# Altium PCB PandMpcb.PcbDoc
Units mil, origin at the board's own origin, x right, y up, seen from the top; angles counter-clockwise.
Board outline 3937.01 x 3937.01 mil, 2 copper layers (Top Layer, Bottom Layer); 67 components, 44 nets, 220 pads, 423 vias.
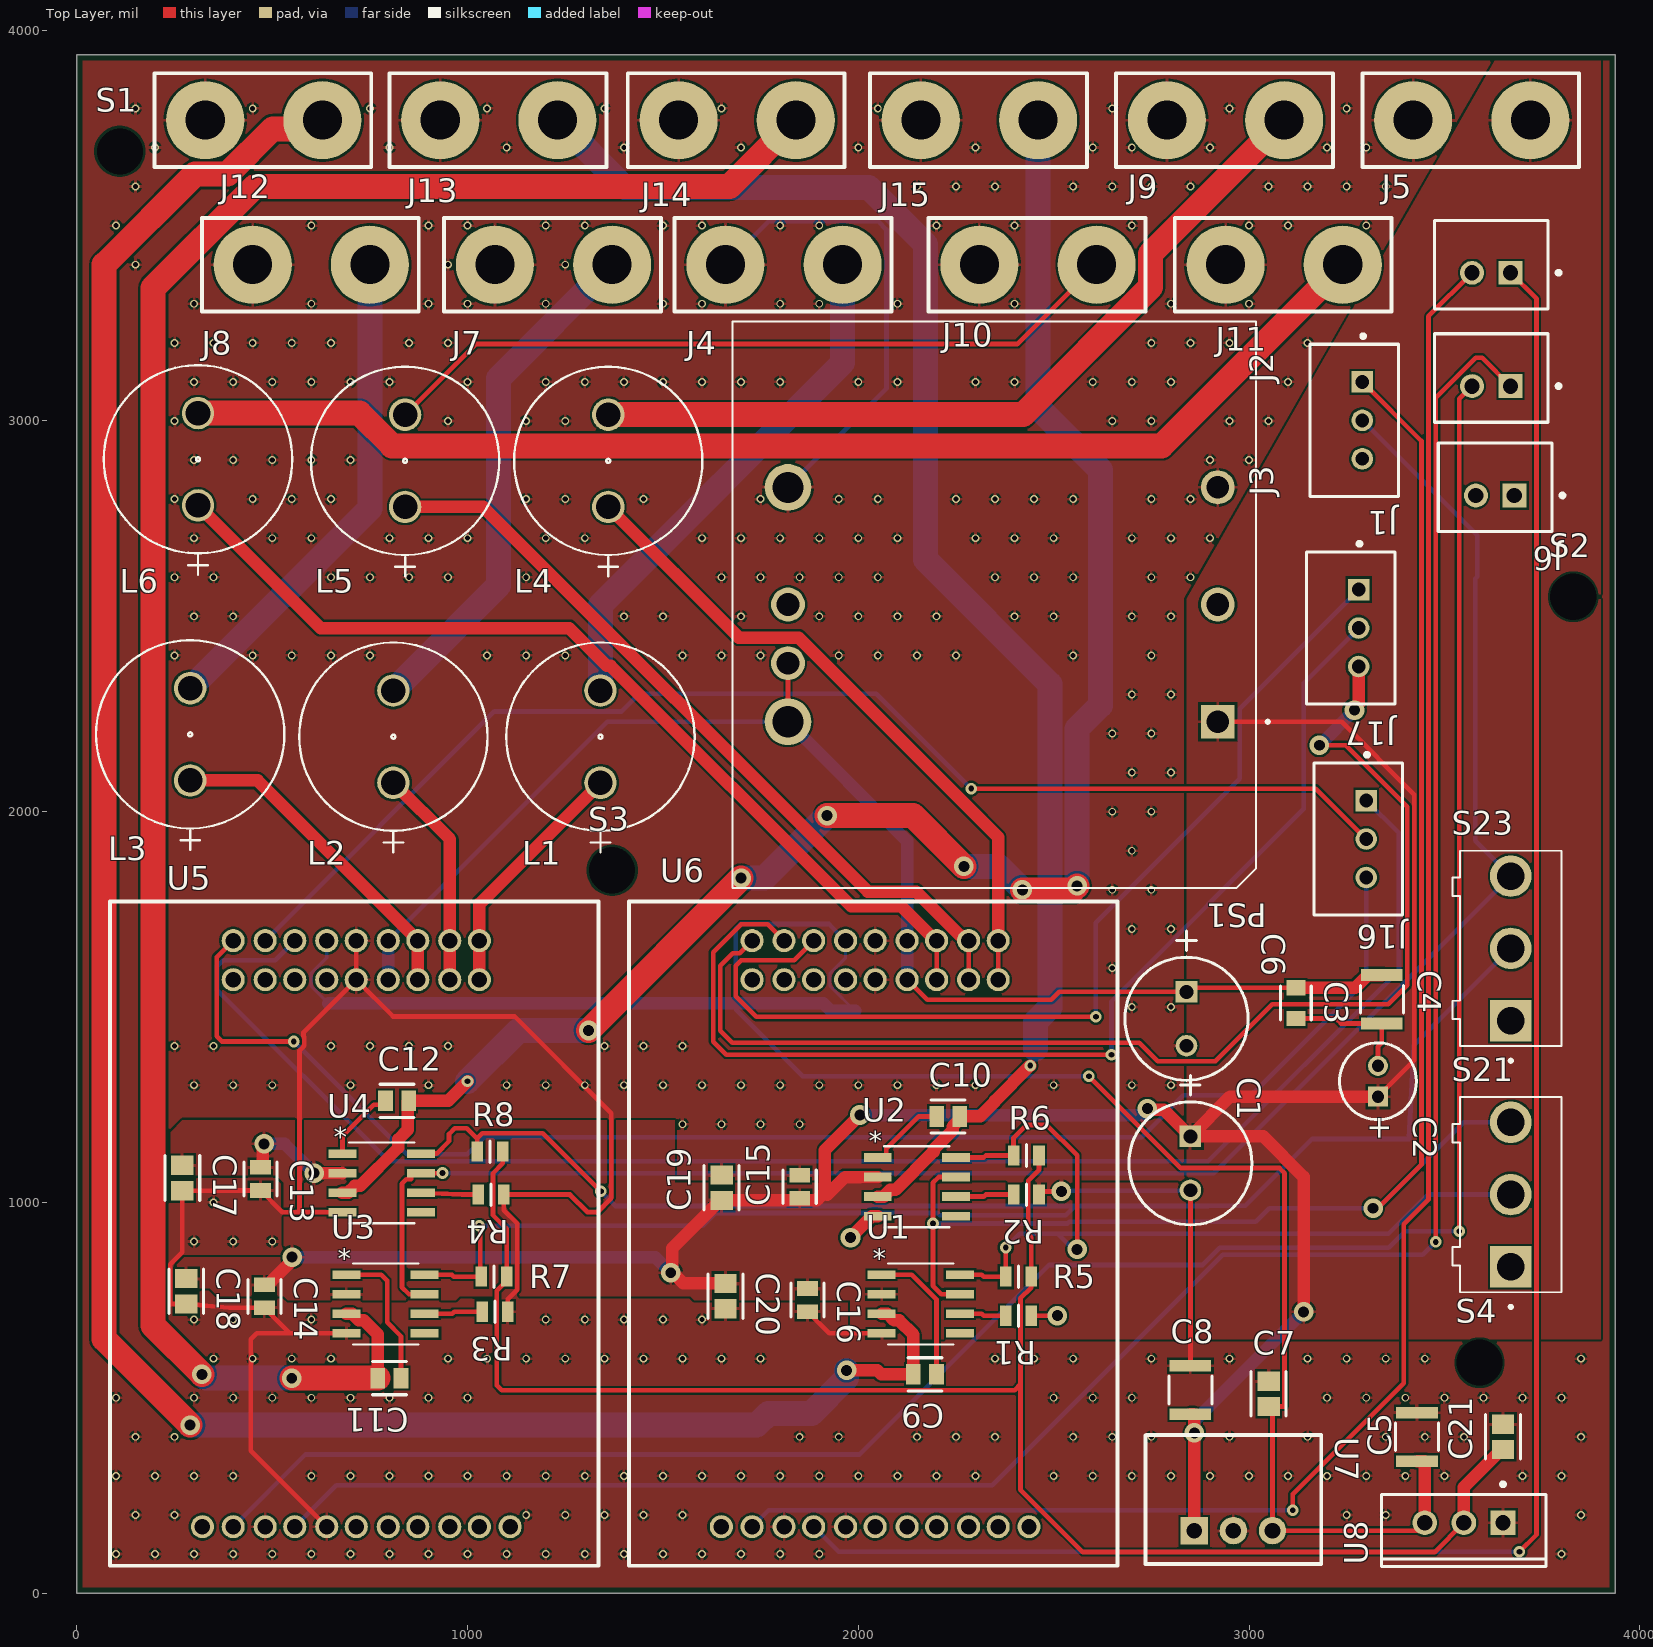
[diagram p0: Top Layer view]
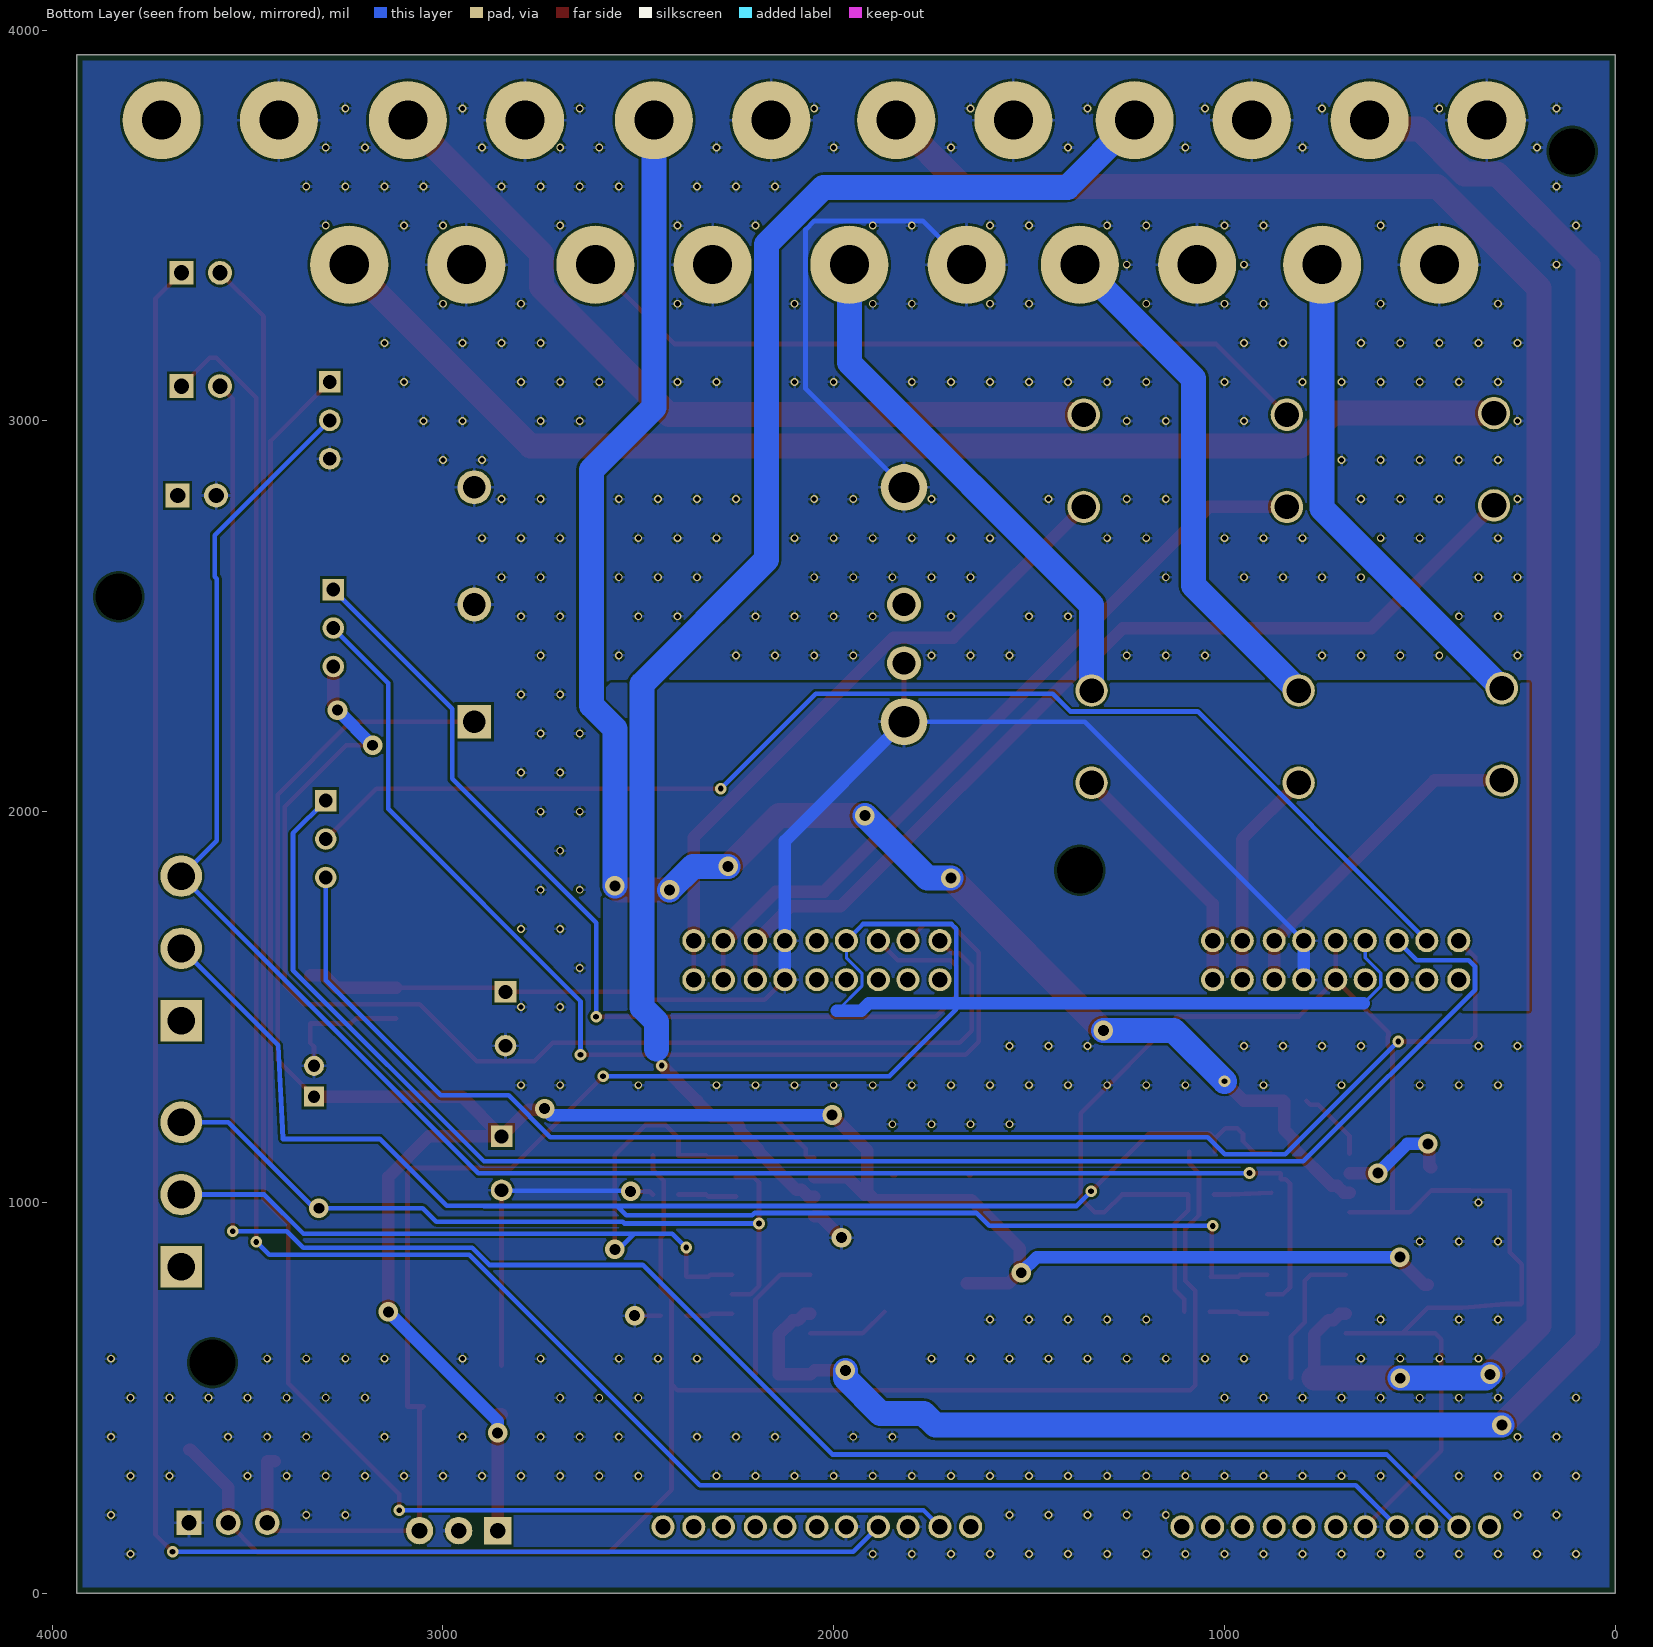
[diagram p1: Bottom Layer view, seen from below]
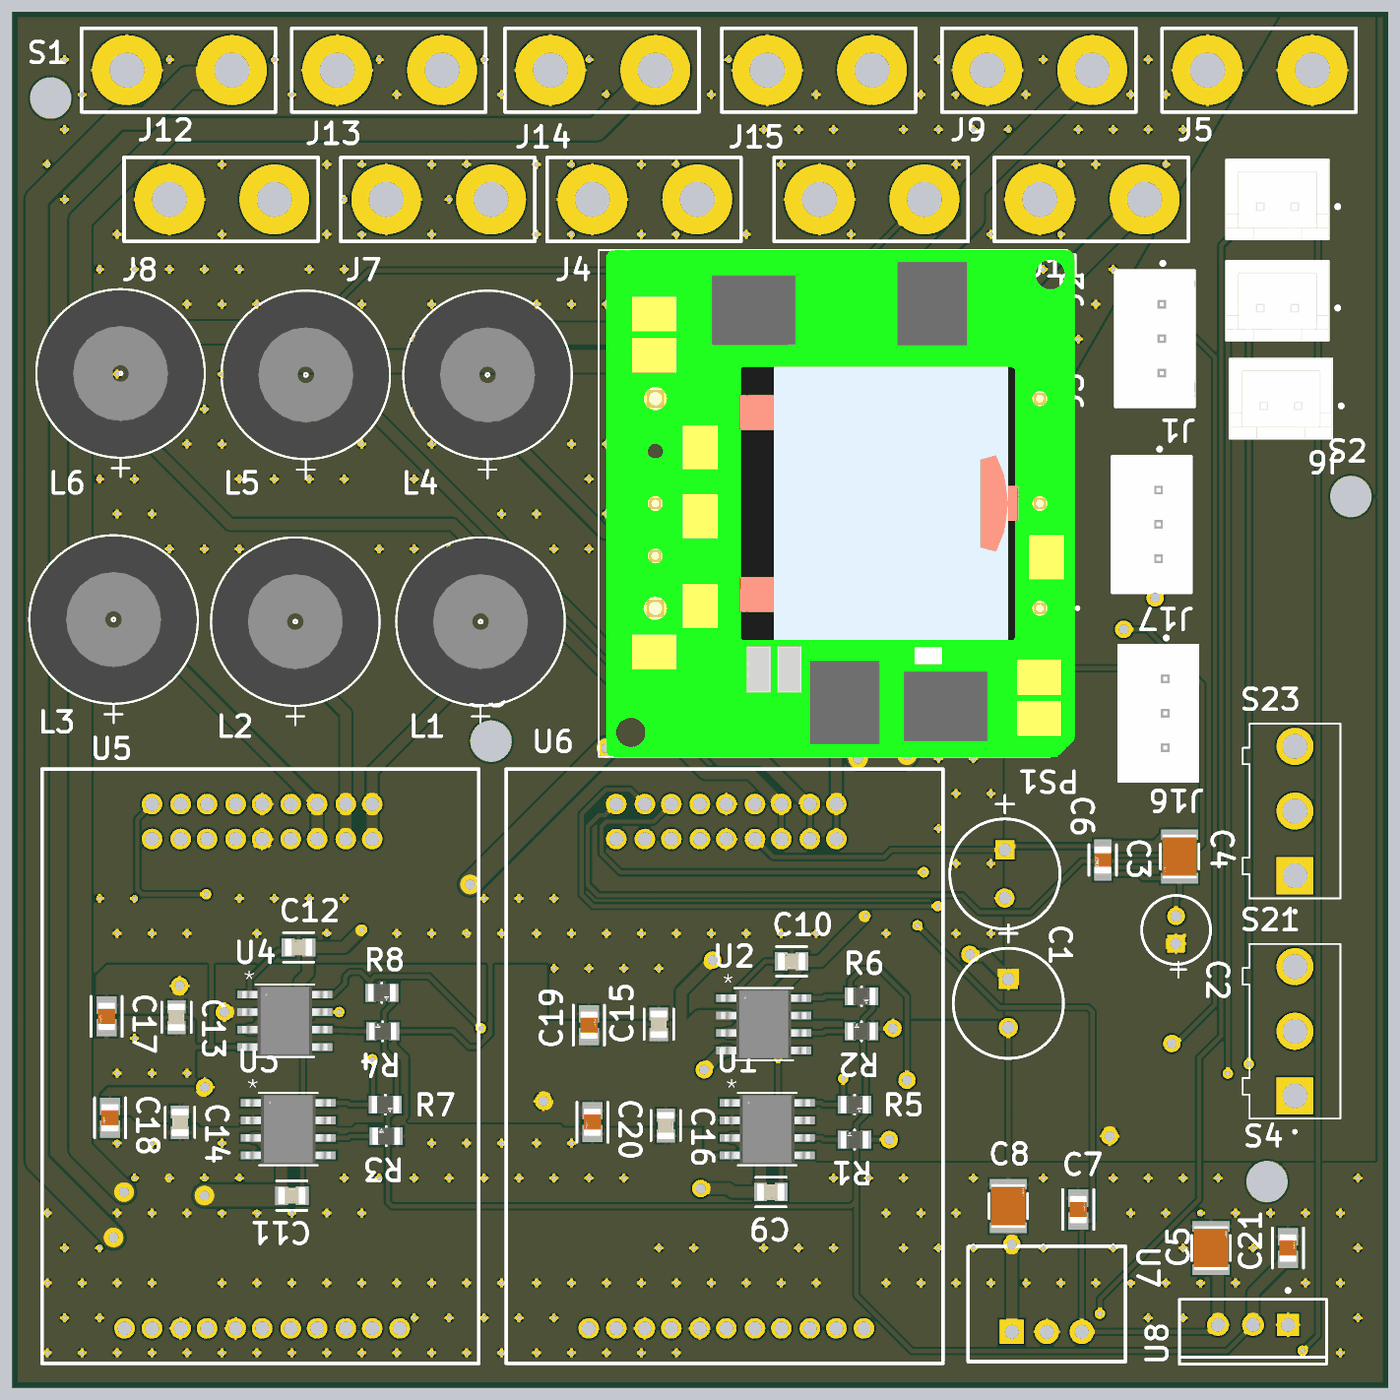
[diagram p2: 3D render of the assembled board from above, using the file's embedded part models]

## Layer stack, top to bottom
Top Solder: solder mask 0.4, Solder Resist, Dk 3.5
Top Layer: signal copper 1.4
Dielectric 1: dielectric 12.6, FR-4, Dk 4.8
Bottom Layer: signal copper 1.4
Bottom Solder: solder mask 0.4, Solder Resist, Dk 3.5

## Board outline
0,0 0,3937.01 3937.01,3937.01 3937.01,0

## Design rules (kind name [scope] priority, off if disabled: settings)
BoardOutlineClearance [All] p1: gap=15 ignorepadtopadclearanceinfootprint=FALSE
Clearance [All] p1: gap=6 ignorepadtopadclearanceinfootprint=FALSE except(0: Arc-Hole Track-Hole SMDPad-Hole THPad-Hole Via-Hole Fill-Hole Poly-Hole Region-Hole Text-Hole)
ComponentClearance [All] p1: gap=1 collisioncheckmode=3 verticalgap=1 showdistances=FALSE
DiffPairsRouting [All] p1: maxlimit=393.7 minlimit=6 mostfreqgap=8 toplayer_minwidth=6 toplayer_maxwidth=15 toplayer_prefwidth=8 bottomlayer_minwidth=6 bottomlayer_maxwidth=15 bottomlayer_prefwidth=8 maxuncoupledlength=500
HoleSize [All] p1: absolutevalues=TRUE maxlimit=265 minlimit=13 maxpercent=80.000 minpercent=20.000
HoleToHoleClearance [All] p1: gap=10 allowstackedmicrovias=FALSE
MinimumAnnularRing [All] p1: minimumring=7
MinimumSolderMaskSliver [All] p1: minsoldermaskwidth=0
PlaneClearance [All] p1: clearance=10
PlaneConnect [All] p1: planeconnectstyle=Direct reliefexpansion=16 reliefentries=4 reliefconductorwidth=6 reliefairgap=6
PolygonConnect [All] p1: connectstyle=Relief reliefconductorwidth=8 reliefentries=4 polygonreliefangle="90 Angle" airgapwidth=6
RoutingCorners [All] p1: cornerstyle=45-Degree minsetback=49.21 maxsetback=49.21
RoutingVias [All] p1: holewidth=15 width=30 viastyle="Through Hole" minholewidth=5 minwidth=5 maxholewidth=100 maxwidth=114
SilkToSilkClearance [All] p1: silktosilkclearance=0
SilkToSolderMaskClearance [IsPad] p1: minsilkscreentomaskgap=6 clearancetoexposedcopper=TRUE
SolderMaskExpansion [All] p1: expansion=2.95 istentingtop=FALSE
Width [All] p1: maxlimit=400 minlimit=6 preferedwidth=12 minimp=50.000000 maximp=50.000000 favimp=50.000000
20 further rules are at their usual default settings.

## Classes and differential pairs
component class PandMshem: C1 C2 C3 C4 C5 C6 C7 C8 C21 L1 L2 L3 L4 L5 L6 U5 U6 U7 U8
component class Solenoid_drivers: C9 C10 C11 C12 C13 C14 C15 C16 C17 C18 C19 C20 R1 R2 R3 R4 R5 R6 R7 R8 S21 S23 U1 U2 U3 U4
component class connectors: J1 J2 J3 J4 J5 J6 J7 J8 J9 J10 J11 J12 J13 J14 J15 J16 J17 S1 S2 S3 S4

## Components (designator, comment, footprint, x,y, rotation, side; value= is the part's Value field where it differs from the comment)
C1 "ECA1HM101" CAPPR65-350-1150X800X1250 2850,1100 r270 top
C2 "ECA1HM220" CAPPR55-200-1100X500X1200 3330,1310 r90 top
C3 "08055C105KAT2A" FP-0805-L_2_01_0_2-W_1_25-MFG 3120,1510 r270 top
C4 "C3225X7S1H106M250AB" FP-C3225-250-0_4-IPC_C 3340,1520 r270 top
C5 "C3225X7S1H106M250AB" FP-C3225-250-0_4-IPC_C 3430,400 r90 top
C6 "ECA1HM101" CAPPR65-350-1150X800X1250 2840,1470 r270 top
C7 "GRM21BR61E226ME44L" FP-GRM21B-0_2-e0_2_0_7-IPC_B 3050,510 r90 top
C8 "C3225X7S1H106M250AB" FP-C3225-250-0_4-IPC_C 2850,520 r90 top
C9 "C0805C104K5RACTU" FP-C0805C-DN-MFG 2170.47,560 r180 top value="0.10 μF"
C10 "C0805C104K5RACTU" FP-C0805C-DN-MFG 2230,1220 r0 top value="0.10 μF"
C11 "C0805C104K5RACTU" FP-C0805C-DN-MFG 800,550 r180 top value="0.10 μF"
C12 "C0805C104K5RACTU" FP-C0805C-DN-MFG 819.53,1260 r0 top value="0.10 μF"
C13 "C0805C104K5RACTU" FP-C0805C-DN-MFG 470,1060 r270 top value="0.10 μF"
C14 "C0805C104K5RACTU" FP-C0805C-DN-MFG 480,759.53 r270 top value="0.10 μF"
C15 "C0805C104K5RACTU" FP-C0805C-DN-MFG 1850,1040 r90 top value="0.10 μF"
C16 "C0805C104K5RACTU" FP-C0805C-DN-MFG 1870,750 r270 top value="0.10 μF"
C17 "GRM21BR6YA106ME43L" FP-GRM21B-0_2-e0_2_0_7-IPC_B 270,1062.51 r270 top
C18 "GRM21BR6YA106ME43L" FP-GRM21B-0_2-e0_2_0_7-IPC_B 280,772.51 r270 top
C19 "GRM21BR6YA106ME43L" FP-GRM21B-0_2-e0_2_0_7-IPC_B 1650,1037.49 r90 top
C20 "GRM21BR6YA106ME43L" FP-GRM21B-0_2-e0_2_0_7-IPC_B 1660,760 r270 top
C21 "GRM21BR61E226ME44L" FP-GRM21B-0_2-e0_2_0_7-IPC_B 3650,400 r90 top
J1 "B3B-XH-A(LF)(SN)" FP-B3B-XH-A_LF_SN-MFG 3269.33,3001.57 r270 top
J2 "B2B-XH-A(LF)(SN)" FP-B2B-XH-A_LF_SN-MFG 3620,3400 r180 top
J3 "B2B-XH-A(LF)(SN)" FP-B2B-XH-A_LF_SN-MFG 3620,3110 r180 top
J4 "Solder Pads" "SOLDER PAD" 1960,3400 r180 top
J5 "Solder Pads" "SOLDER PAD" 3720,3770 r180 top
J6 "B2B-XH-A(LF)(SN)" FP-B2B-XH-A_LF_SN-MFG 3630,2830 r180 top
J7 "Solder Pads" "SOLDER PAD" 1370,3400 r180 top
J8 "Solder Pads" "SOLDER PAD" 750,3400 r180 top
J9 "Solder Pads" "SOLDER PAD" 3090,3770 r180 top
J10 "Solder Pads" "SOLDER PAD" 2610,3400 r180 top
J11 "Solder Pads" "SOLDER PAD" 3240,3400 r180 top
J12 "Solder Pads" "SOLDER PAD" 628.48,3770 r180 top
J13 "Solder Pads" "SOLDER PAD" 1230,3770 r180 top
J14 "Solder Pads" "SOLDER PAD" 1840,3770 r180 top
J15 "Solder Pads" "SOLDER PAD" 2460,3770 r180 top
J16 "B3B-XH-A(LF)(SN)" FP-B3B-XH-A_LF_SN-MFG 3279.33,1930 r270 top
J17 "B3B-XH-A(LF)(SN)" FP-B3B-XH-A_LF_SN-MFG 3260,2470 r270 top
L1 "19R472C" 1900R_MUR 1340,2074 r90 top
L2 "19R472C" 1900R_MUR 810,2074 r90 top
L3 "19R472C" 1900R_MUR 290,2080 r90 top
L4 "19R472C" 1900R_MUR 1360,2780 r90 top
L5 "19R472C" 1900R_MUR 840,2780 r90 top
L6 "19R472C" 1900R_MUR 310,2784 r90 top
PS1 "I7C4W012A050V-001-R" CONV_I7C4W012A050V-001-R 2370,2530 r180 top
R1 "10k" FP-MCU0805-IPC_C 2410,710 r180 top
R2 "10k" FP-MCU0805-IPC_C 2430,1020 r180 top
R3 "10k" FP-MCU0805-IPC_C 1070,720 r180 top
R4 "10k" FP-MCU0805-IPC_C 1060,1020 r180 top
R5 "MCU08050D1002BP100" FP-MCU0805-IPC_C 2410,810 r0 top
R6 "MCU08050D1002BP100" FP-MCU0805-IPC_C 2430,1120 r0 top
R7 "MCU08050D1002BP100" FP-MCU0805-IPC_C 1067.45,810 r0 top
R8 "MCU08050D1002BP100" FP-MCU0805-IPC_C 1057.45,1130 r0 top
S1 "Screw M3" "Screw M3" 110,3690 r0 top
S2 "Screw M3" "Screw M3" 3830,2550 r0 top
S3 "Screw M3" "Screw M3" 1370,1850 r0 top
S4 "Screw M3" "Screw M3" 3590,590 r0 top
S21 "MS12ANW03" SW_MS12ANW03 3670,1020 r90 top
S23 "MS12ANW03" SW_MS12ANW03 3670,1650 r90 top
U1 "MP6610GS-P" SOIC-8_MP6610_MNP 2160,740 r0 top
U2 "MP6610GS-P" SOIC-8_MP6610_MNP 2150,1040 r0 top
U3 "MP6610GS-P" SOIC-8_MP6610_MNP 790,740 r0 top
U4 "MP6610GS-P" SOIC-8_MP6610_MNP 780,1050 r0 top
U5 "Component_1" PCBComponent_1 85.12,1770 r270 top
U6 "Component_1" PCBComponent_1 1413.15,1770 r270 top
U7 "5v Power Supply" 5v_supply 2860,160 r0 top
U8 "LM1117T-3.3/NOPB" NDE0003A 3550,180 r180 top

## Footprints (in the part's own frame and the unit in brackets; to place one, negate y for a bottom-side part, rotate by r counter-clockwise, add the part's x,y. Pads: shape width x height; smd on the part's side, far side on the other; paste and mask are expansions set on the pad)
5v_supply [mil]
  rect 70x70 hole 40 mask+2.5: 1(0,0)
  round 70 hole 40 mask+2.5: 2(100,0) 3(200,0)
  silkscreen extent -125,-85 325,245
1900R_MUR [mil]
  round 83 / inner round 60 / far side round 83 hole 63 mask+0: 1(0,0) 2(236,0)
  silkscreen extent -178,-241 359,241, body extent -118,-236 354,236, height 827
CAPPR55-200-1100X500X1200 [mm] "THD, 2-Leads, Dia 5mm, Body Length 11mm"
  rect 1.3x1.3 hole 0.8: 1(-1,0)
  round 1.3 hole 0.8: 2(1,0)
  silkscreen extent -2.5,-2.5 2.5,2.5, body extent -2.5,-2.5 2.5,2.5, height 12
CAPPR65-350-1150X800X1250 [mm] "THD, 2-Leads, Dia 8mm, Body 11.5mm"
  rect 1.4x1.4 hole 0.9: 1(-1.75,0)
  round 1.4 hole 0.9: 2(1.75,0)
  silkscreen extent -5.71,-4 4,4, body extent -4,-4 4,4, height 12.5
CONV_I7C4W012A050V-001-R [mm]
  rect 2.205x2.205 / inner round 2.205 / far side rect 2.205x2.205 hole 1.47: 1(-13.97,7.615)
  round 2.205 hole 1.47: 2(-13.97,-0.005) 3(-13.97,-7.625) 6(13.97,-0.005) 7(13.97,3.805)
  round 3.03 hole 2.02: 4(13.97,-7.625) 8(13.97,7.615)
  silkscreen extent -17.32,-18.42 17.57,18.42, body extent -17.02,-18.42 17.02,18.42, height 12.7
FP-0805-L_2_01_0_2-W_1_25-MFG [mm]
  rect 1x1.25 smd paste+0 mask+0: 1(-1,0) 2(1,0)
  silkscreen extent -1.11,-1 1.11,1, body extent -1.6,-0.82 1.6,0.82, height 0.25
FP-B2B-XH-A_LF_SN-MFG [mm]
  rect 1.55x1.55 hole 1 paste-1000 mask+0: 1(-1.25,0.525)
  round 1.55 hole 1 paste-1000 mask+0: 2(1.25,0.525)
  silkscreen extent -4.5,-2.88 3.7,2.87, body extent -3.8,-2.98 3.8,2.98, height 0.25
FP-B3B-XH-A_LF_SN-MFG [mm]
  rect 1.4x1.4 hole 0.9 paste-1000 mask+0: 1(-2.5,0.525)
  round 1.4 hole 0.9 paste-1000 mask+0: 2(0,0.525) 3(2.5,0.525)
  silkscreen extent -5.6,-2.87 4.95,2.88, body extent -5.05,-2.98 5.05,2.98, height 0.25
FP-C0805C-DN-MFG [mm]
  rect 0.95x1.35 smd paste+0 mask+0: 1(-0.75,0) 2(0.75,0)
  silkscreen extent -1.1,-1.07 1.1,1.07, body extent -1.4,-0.85 1.4,0.85, height 0.25
FP-C3225-250-0_4-IPC_C [mm]
  rect 0.753x2.704 smd paste+0 mask+0: 1(-1.575,0) 2(1.575,0)
  silkscreen extent -0.9,-1.4 0.9,1.4, body extent -2.05,-1.5 2.05,1.5, height 0.25
FP-GRM21B-0_2-e0_2_0_7-IPC_B [mil]
  rect 49.4x57.33 smd paste+0 mask+0: 1(-32.51,0) 2(32.51,0)
  silkscreen extent -57,-44 57,44, body extent -67,-39 67,39, height 10
FP-MCU0805-IPC_C [mil]
  rect 29.87x51.5 smd paste+0 mask+0: 1(-32.55,0) 2(32.55,0)
  silkscreen extent 0,-28 0,28, body extent -51,-31 51,31, height 10
NDE0003A [mm] "FM, 3-Leads, Body 10.7x4.7mm, Pitch 2.54mm"
  rect 1.6x1.6 hole 1: 1(-2.54,0)
  round 1.6 hole 1: 2(0,0) 3(2.54,0)
  silkscreen extent -5.35,-2.62 5.35,2.85, body extent -5.4,-1.9 5.4,2.9, height 19.4
PCBComponent_1 [mm]
  round 1.5 hole 1 mask+0.064: 1(2.54,24) 2(5.08,24) 3(2.54,22.08) 4(5.08,22.08) 5(2.54,20) 6(5.08,20) 7(2.54,18.08) 8(5.08,18.08) 9(2.54,16) 10(5.08,16) 11(2.54,14.08) 12(5.08,14.08) 13(2.54,12) 14(5.08,12) 15(2.54,10.08) 16(5.08,10.08) 17(2.54,8) 18(5.08,8) 19(40.64,6) 20(40.64,8) 21(40.64,10.08) 22(40.64,12) 23(40.64,14.08) 24(40.64,16) 25(40.64,18.08) 26(40.64,20) 27(40.64,22.08) 28(40.64,24) 29(40.64,26)
  silkscreen extent 0,0 43.18,31.75
"Screw M3" [mm]
  round 0 hole 3: x(0,0)
SOIC-8_MP6610_MNP [mil]
  rect 71.5x22 smd paste+0 mask+0: 1(-100.25,75) 2(-100.25,25) 3(-100.25,-25) 4(-100.25,-75) 5(100.25,-75) 6(100.25,-25) 7(100.25,25) 8(100.25,75)
  silkscreen extent -84,-104 84,104, body extent -122,-99 122,99, height 69
"SOLDER PAD" [mil]
  round 200 hole 100 mask+2.5: 1(0,0) 2(300,0)
  silkscreen extent -125,-120 430,120
SW_MS12ANW03 [mm]
  rect 2.7x2.7 hole 1.8: 1(-4.7,0)
  round 2.7 hole 1.8: 2(0,0) 3(4.7,0)
  silkscreen extent -7.4,-3.3 6.35,3.8

## Part data
C1 C6: library part CMP-1665-00042-2, "Aluminum Electrolytic Capacitor, 100 uF, +/- 20%, 50 V, -40 to 85 degC, 2-Pin THD, RoHS, Bulk", Capacitance=100uF, Case/Package=Radial, Dielectric Material=Aluminium, Leakage Current=3uA, Manufacturer=Panasonic, Max Operating Temperature=85degC, Min Operating Temperature=-40degC, Package Description="2-Pin Radial Lead, Dia 8 mm, Height 12.5 mm", Package Quantity=200, Package Reference=CAPPR65-350-1150X800X1250, Ripple Current=250mA, Tolerance=20%, Voltage=50V, Datasheet URL=https://industrial.panasonic.com/cdbs/www-data/pdf/RDF0000/ABA0000C1218.pdf, Datasheet Version="Rev. 05, 10/2016", Diameter=8mm, Dissipation Factor=0.12%, Height=11.5mm, Height - Seated (Max)=0.492inch, Lead Diameter=0.6mm, Lead Free=LeadFree, Lead Pitch=3.5mm, Lead/Base Style=Straight, Length=11.5mm, Life (Hours)=2000Hour, Manufacturer URL=http://www.panasonic.com/, Mount=ThroughHole, Number of Pins=2, Packaging=Bulk, Polarity=Polar, Radiation Hardening=No, REACH SVHC=NoSVHC, Ripple Current (AC)=250mA, RoHSCompliant=true, Termination=Radial, Voltage Rating=50V, Voltage Rating (DC)=50V
C2: library part CMP-1665-00036-2, "Aluminum Electrolytic Capacitor, 22 uF, +/- 20%, 50 V, -40 to 85 degC, 2-Pin THD, RoHS, Bulk", Capacitance=22uF, Case/Package=Radial, Leakage Current=3uA, Manufacturer=Panasonic, Max Operating Temperature=85degC, Min Operating Temperature=-40degC, Package Description="2-Pin Radial Lead, Dia 5 mm, Height 12 mm", Package Quantity=200, Package Reference=CAPPR55-200-1100X500X1200, Ripple Current=100mA, Tolerance=20%, Voltage=50V, Datasheet URL=https://industrial.panasonic.com/cdbs/www-data/pdf/RDF0000/ABA0000C1218.pdf, Datasheet Version="Rev. 05, 10/2016", Diameter=5mm, Dissipation Factor=0.12%, Height=11mm, Height - Seated (Max)=0.472inch, Lead Diameter=0.5mm, Lead Pitch=2mm, Lead/Base Style=Straight, Length=11mm, Life (Hours)=2000Hour, Manufacturer URL=http://www.panasonic.com/, Mount=ThroughHole, Packaging=Bulk, Radiation Hardening=No, REACH SVHC=NoSVHC, Ripple Current (AC)=100mA, RoHSCompliant=true, Termination=Radial, Voltage Rating=50V, Voltage Rating (DC)=50V
C3: library part CMP-2007-04696-2, "General Purpose Ceramic Capacitor, 0805, 1uF, 10%, X7R, 15%, 50V", Capacitance=1uF, Case Code (Imperial)=0805, Case Code (Metric)=2012, Dielectric=X7R, Max Operating Temperature=125°C, Min Operating Temperature=-55°C, Package Quantity=1, Tolerance=10%, Voltage=50V, Case/Package=0805, Contact Plating=Tin, Depth=1.25mm, Dissipation Factor=2.5%, Lead Free="Lead Free", Length=2.01mm, Mount="Surface Mount", Packaging="Tape and Reel", Radiation Hardening=No, REACH SVHC="No SVHC", RoHS Compliant=Yes, Series=-, Termination=SMD/SMT, Thickness=0.037inch, Voltage Rating=50V, Voltage Rating (DC)=50V, Width=0.049inch
C4 C5 C8: library part CMP-08246-003772-1, "Multilayer Ceramic Capacitors 10uF ±20% 50V X7S SMD 1210", Capacitance=10uF, Case Code (Imperial)=1210, Case Code (Metric)=3225, Dielectric=X7S, Dielectric Material=Ceramic, Max Operating Temperature=125°C, Min Operating Temperature=-55°C, Package Quantity=1, Tolerance=20%, Voltage=50V, Case/Package=1210, Depth=2.5mm, Height=2.5mm, Lead Free="Lead Free", Length=3.2mm, Mount="Surface Mount", Number of Pins=2, Packaging="Tape and Reel", Radiation Hardening=No, REACH SVHC="No SVHC", Resistor Type=Ceramic, RoHS Compliant=Yes, Termination=SMD/SMT, Thickness=0.11inch, Voltage Rating=50V, Voltage Rating (DC)=50V, Weight=0.000564oz, Width=0.098inch
C7 C21: library part CMP-2007-03222-3, "Chip Multilayer Ceramic Capacitors for General Purpose, 0805, 22uF, X5R, 15%, 20%, 25V", Capacitance=22uF, Case Code (Imperial)=0805, Case Code (Metric)=2012, Dielectric=X5R, Max Operating Temperature=85°C, Min Operating Temperature=-55°C, Package Quantity=3000, Resistor Type=Ceramic, Tolerance=20%, Voltage=25V, Case/Package=0805, Depth=1.25mm, Height=1.25mm, Lead Free="Lead Free", Length=2mm, Material=Ceramic, Mount="Surface Mount", Packaging="Tape and Reel", REACH SVHC="No SVHC", Termination=SMD/SMT, Thickness=0.057inch, Voltage Rating=25V, Voltage Rating (DC)=25V, Weight=0.000335oz, Width=1.25mm
C9 C10 C11 C13 C14 C15 C16: library part CMP-2007-00279-2, "CAP CER 0.1UF 50V X7R 0805", Capacitance="0.10 μF", Manufacturer=KEMET, Package=C0805C-DN, Temperature="-55°C to +125°C", Temperature Characteristic=X7R, Temperature Coefficient=30ppm/°C, Temperature Range High=+125°C, Temperature Range Low=-55°C, Tolerance=0.1, Voltage Rating="50 V", Automotive=No, Category=Cap, ComponentLink2Description=Datasheet, ComponentLink2URL=https://content.kemet.com/datasheets/KEM_C1003_C0G_SMD.pdf, Device Class L1="Passive Components", Device Class L2=Capacitors, Device Class L3="Ceramic Capacitors", Digikey Description="CAP CER 0.1UF 50V X7R 0805", Height=0.88mm, Ipc Land Pattern Name=CAPC200125X78, Lead Free=Yes, Manufacturer Part Number=C0805C104K5RACTU, Material=Ceramic, Mouser Description="Cap Ceramic 0.1uF 50V X7R 10% SMD 2.0 x 1.2 mm 125 C Paper T/R", Octopart=https://octopart.com/c0805c104k5ractu-kemet-143926, RoHS=TRUE
C12: library part CMP-2007-00279-2, "CAP CER 0.1UF 50V X7R 0805 C0805C104K5RACTU", Capacitance="0.10 μF", Manufacturer=KEMET, Package=C0805C-DN, Temperature="-55°C to +125°C", Temperature Characteristic=X7R, Temperature Coefficient=30ppm/°C, Temperature Range High=+125°C, Temperature Range Low=-55°C, Tolerance=0.1, Voltage Rating="50 V", Automotive=No, Category=Cap, ComponentLink2Description=Datasheet, ComponentLink2URL=https://content.kemet.com/datasheets/KEM_C1003_C0G_SMD.pdf, Device Class L1="Passive Components", Device Class L2=Capacitors, Device Class L3="Ceramic Capacitors", Digikey Description="CAP CER 0.1UF 50V X7R 0805", Height=0.88mm, Ipc Land Pattern Name=CAPC200125X78, Lead Free=Yes, Manufacturer Part Number=C0805C104K5RACTU, Material=Ceramic, Mouser Description="Cap Ceramic 0.1uF 50V X7R 10% SMD 2.0 x 1.2 mm 125 C Paper T/R", Octopart=https://octopart.com/c0805c104k5ractu-kemet-143926, RoHS=TRUE
C17 C18 C19 C20: library part CMP-06035-010759-1, "Chip Multilayer Ceramic Capacitors for General Purpose, 0805, 10uF, X5R, 15%, 20%, 35V", Capacitance=10uF, Case Code (Imperial)=0805, Case Code (Metric)=2012, Dielectric=X5R, Max Operating Temperature=85°C, Min Operating Temperature=-55°C, Package Quantity=3000, Tolerance=20%, Voltage Rating=35V, Case/Package=0805, Height=1.25mm, Length=0.079inch, Mount="Surface Mount", Packaging="Tape and Reel", Termination=SMD/SMT, Thickness=0.057inch, Voltage Rating (DC)=35V, Weight=0.000335oz, Width=0.049inch
J1 J16 J17: library part CMP-17439-000014-3, "CONN HEADER VERT 3POS 2.5MM", Color=Natural, Contact Resistance=20mR, Current Rating=3A, Flammability Rating="UL94 V-0", Housing Color=White, Insulation Resistance=1GR, Max Operating Temperature=85°C, Max Voltage Rating (AC)=250V, Min Operating Temperature=-25°C, Connector Type=Header, Contact Finish - Mating=TIN, Contact Material=Brass, Contact Plating=Tin, Contact Shape=Square, Contact Type="Male Pin", Depth=5.75mm, Fastening Type=Detent, Gender=Male, Housing Material=Polyamide, Insulation Color=Natural, Insulation Material=Nylon, Lead Free="Lead Free", Lead Pitch=2.5mm, Length=9.9mm, Max Current Rating=3A, Max Voltage Rating (DC)=250V, Mount="Through Hole", Number of Contacts=3, Number of Positions=3, Number of Rows=1, Orientation=Straight, Packaging=Bulk, Pitch=2.5mm, REACH SVHC="No SVHC", Series=XH, Termination=Solder, Voltage Rating=250V, Voltage Rating (AC)=250V, Wire/Cable Gauge=22AWG
J2 J3 J6: library part CMP-2000-05888-3, "CONN HEADER VERT 2POS 2.5MM", Color=Natural, Contact Resistance=20mR, Current Rating=3A, Housing Color=White, Insulation Resistance=1GR, Max Operating Temperature=85°C, Max Voltage Rating (AC)=250V, Min Operating Temperature=-25°C, Connector Type="Male Pin", Contact Material=Brass, Contact Plating=Tin, Contact Type="Male Pin", Depth=5.75mm, Fastening Type=Detent, Housing Material=Polyamide, Lead Free="Lead Free", Lead Pitch=2.5mm, Length=7.4mm, Max Current Rating=3A, Max Voltage Rating (DC)=250V, Mount="Through Hole", Number of Contacts=2, Number of Positions=2, Number of Rows=1, Orientation=Straight, Packaging=Bulk, Pitch=2.5mm, REACH SVHC="No SVHC", Series=XH, Termination=Solder, Voltage Rating=250V, Voltage Rating (AC)=250V, Wire/Cable Gauge=22AWG
J4 J5 J7 J8 J9 J10 J11 J12 J13 J14 J15 U7: library part Component_1
L1 L2 L3 L4 L5 L6: "No Description Available", Mfr_Name=Murata
PS1: "Non-Isolated PoL Module DC DC Converter 1 Output 5 ~ 28V - - - 12.5A 9V - 53V Input", Package="Sixteenth Brick TDK-Lambda Americas Inc.", Availability="In Stock", Check_prices=https://www.snapeda.com/parts/I7C4W012A050V-001-R/TDK-Lambda+Americas+Inc/view-part/?ref=eda, MF="TDK-Lambda Americas Inc", MP=I7C4W012A050V-001-R, Price=None, Purchase-URL=https://pricing.snapeda.com/search/part/I7C4W012A050V-001-R/?ref=eda, SnapEDA_Link=https://www.snapeda.com/parts/I7C4W012A050V-001-R/TDK-Lambda+Americas+Inc/view-part/?ref=snap
R1 R2 R3 R4: library part CMP-02407-010458-1, "RES 1.05K OHM 0.5% 1/5W 0805   MCU08050D1002BP100", Case/Package=0805, Max Operating Temperature=125°C, Max Power Dissipation=125mW, Min Operating Temperature=-55°C, Package Quantity=1000, Resistance=10kR, Temperature Coefficient=25ppm/°C, Tolerance=0.1%, Voltage Rating (DC)=100V, Composition="Thin Film", Contact Plating=Tin, Depth=1.25mm, Height=0.022inch, Lead Free="Lead Free", Length=2mm, Military Standard=Not, Mount="Surface Mount", Number of Terminations=2, Packaging="Tape and Reel", Power Rating=125mW, Radiation Hardening=No, Width=0.049inch
R5 R6 R7 R8: library part CMP-02407-010458-1, "RES 1.05K OHM 0.5% 1/5W 0805", Case/Package=0805, Max Operating Temperature=125°C, Max Power Dissipation=125mW, Min Operating Temperature=-55°C, Package Quantity=1000, Resistance=10kR, Temperature Coefficient=25ppm/°C, Tolerance=0.1%, Voltage Rating (DC)=100V, Composition="Thin Film", Contact Plating=Tin, Depth=1.25mm, Height=0.022inch, Lead Free="Lead Free", Length=2mm, Military Standard=Not, Mount="Surface Mount", Number of Terminations=2, Packaging="Tape and Reel", Power Rating=125mW, Radiation Hardening=No, Width=0.049inch
S21 S23: "Slide Switch SPDT Through Hole", Package=None, Availability=Unavailable, MF="NKK Switches", MP=MS12ANW03, Price=None, SnapEDA_Link=https://www.snapeda.com/parts/MS12ANW03/NKK%20Switches/view-part/489520/?ref=snap
U1 U2 U3 U4: "No Description Available", Mfr_Name="Monolithic Power Systems", RefDes=RefDes, Type=Type
U8: library part CMP-0062-02494-3, "800mA Low-Dropout Linear Regulator, 3-pin TO-220, Pb-Free", Manufacturer="Texas Instruments", PackageTopMarking=NSUZXYTTE#*LM1117T*3.3, PowerWise=N, ComponentLink1Description="Datasheet URL", ComponentLink1URL=http://www.ti.com/general/docs/lit/getliterature.tsp?genericPartNumber=LM1117-N&fileType=pdf, CompType="LDO IC", PackageDescription="TO-220, Molded, 3 Lead, Straight", PackageReference=NDE0003A, PinCount=3, RoHS=Y

## Via types
v1: diameter 20, hole 13, Top Layer to Bottom Layer, 382 vias
v2: diameter 50, hole 28, Top Layer to Bottom Layer, 25 vias
v3: diameter 30, hole 15, Top Layer to Bottom Layer, 16 vias

## Nets (pads, with @x,y where several pads share a name; then routed paths per layer and width w, separated by ;. In a path a pad name is that pad's centre, name@x,y a point inside that pad or via, vN(x,y) a via of type N, cw(c..) or ccw(c..) an arc to the next point about the centre after c; other vN are vias at no path point)
24v: C3.1 C4.1 C6.1 PS1.7 PS1.8 U5.7 U5.8 U6.7 U6.8 | length 3554.3
  Top Layer w12: PS1.8 PS1.7 ; U6.8 2176.49,1518.47 2493.61,1518.47 2514.04,1538.9 C6.1 2850.47,1549.37 C3.1
  Top Layer w32: C3.1 3271.3,1549.37 3303.94,1582.01 C4.1
  Bottom Layer w12: U5.7 1357.13,2230.2 PS1.8
  Bottom Layer w32: U5.8 U5.7 ; PS1.8 2124.96,1925.24 U6.7 U6.8
+3.3: C21.1 R5.2 R6.2 R7.2 R8.2 U8.2 | length 4329.6
  Top Layer w12: R8.2 1090,1100 1065,1075 1065,967 1100,932 R7.2 1100,799 1075,774 1075,531.5 1087.5,519 2400,519 2415,534 ; R6.2 2462.55,1083.55 2435,1056 2435,918.55 2442.55,911 R5.2 2442.55,782 2415,754.45 2415,534 ; U8.2 3475,105 2575,105 2415,265 2415,534
  Top Layer w32: U8.2 3550,271.46 3646.03,367.49 C21.1
+5: C5.1 C7.1 U5.11 U6.11 U7.3 U8.3 | length 5397.7
  Top Layer w12: v3(2590,1323) 2825,1088 3078,1088 3091,1075 3091,478.49 3090,477.49 C7.1 3060,468.79 U7.3 3430,160 U8.3
  Top Layer w32: C5.1 3448.83,337.99 3450,336.82 U8.3
  Bottom Layer w8: U5.11 639.45,1625.9 599.92,1586.37 599.92,1553.63 643.55,1510 ; U6.11 1967.48,1625.9 1927.95,1586.37 1927.95,1553.63 1991.58,1490
  Bottom Layer w12: U6.11 1924.98,1712.5 1698.5,1712.5 1686,1700 1686,1510 1686,1494.25 1857.25,1323 v3(2590,1323)
  Bottom Layer w32: 643.55,1510 1686,1510 1910,1510 1930,1490 1991.58,1490
Battery: C1.1 C2.1 C8.1 C13.1 C14.1 C15.1 C16.1 C17.1 C18.1 C19.1 C20.1 J5.1 PS1.1 U1.2 U2.2 U3.2 U4.2 U7.1 | length 6640.1
  Top Layer w12: PS1.1 3236.8,2230.2 3423.23,2043.77 3423.23,1363.86 C2.1
  Top Layer w32: C13.1 472.81,1089.53 475.51,1092.23 475.51,1146.56 v2(478.95,1150) ; C14.1 487.87,789.06 547.5,848.68 547.5,856.56 v2(550.94,860) ; v2(607,1075) U4.2 ; v2(1520,820) 1523.44,823.44 1523.44,882.39 1646.03,1004.98 C19.1 1893.08,1004.98 1914.17,1026.07 1914.17,1133.7 v2(2004.16,1223.69) ; v2@1524.87,820 1552.36,792.51 C20.1 ; 1920.62,1019.62 1966,1065 U2.2 ; v2(2740,1240) 2743.44,1236.56 2782.34,1236.56 C1.1 ; C8.1 2858.83,457.99 2860,456.82 v2(2860,410) U7.1 ; v2(3140,720) 3140,1065.6 3036.7,1168.9 C1.1 ; C2.1 2951.73,1270.63 C1.1
  Bottom Layer w32: v2(478.95,1150) 532,1150 606.3,1075.7 606.3,1075 v2(607,1075) ; v2(550.94,860) 1480,860 v2(1520,820) ; v2(2004.16,1223.69) 2723.69,1223.69 v2(2740,1240) ; v2(2860,410) 2860,440 v2(3140,720)
GND: C1.2 C2.2 C3.2 C4.2 C5.2 C6.2 C7.2 C8.2 C13.2 C14.2 C15.2 C16.2 C17.2 C18.2 C19.2 C20.2 C21.2 J1.3 J4.2 J5.2 J6.2 J7.2 J8.2 J9.2 J10.2 J11.2 J12.2 J13.2 J14.2 J15.2 PS1.2 PS1.3 PS1.4 R1.1 R2.1 R3.1 R4.1 U1.4 U2.4 U3.4 U4.4 U5.9 U5.10 U5.21 U5.23 U6.9 U6.10 U6.21 U6.23 U7.2 U8.1 | length 7076.5
  Top Layer w12: U5.23 445,364.45 445,650 460,665 545,665 ; U4.4 570,975 ; U3.4 545,665 ; U5.9 U5.10 ; R3.1 1102.55,752.55 1127,777 1127,945.97 1092.55,980.42 R4.1 1262,1020 1307,975 1332,975 1368,1011 1368,1228 1120,1476 809.04,1476 U5.10 ; C19.2 C19.2@1653.97,1070 ; C15.2@1842.13,1069.53 C15.2 ; C16.2 1925.47,665 U1.4 ; R1.1 v2(2509.51,710) ; R2.1 2470.55,1028 v2(2520,1028) ; C8.2 C1.2 ; C3.2 3223,1470.63 3235.64,1457.99 C4.2 3340,1408 3330,1398 C2.2 ; 545,665 C14.2 390,730 C18.2 240,740 239,741 239,842 270,873 C17.2 370.47,1030.47 C13.2 525.47,975 570,975 ; 570,975 570,1388.82 582,1400.82 582,1423.18 580.08,1425.1 580.08,1435.04 U5.10
  Top Layer w32: v2(1980,910) 2035,965 U2.4
  Bottom Layer w12: J4.2 1772,3512 2050,3512 2072,3490 2072,3082.2 PS1.4 ; v2(2520,1028) 2521.55,1029.55 2848.45,1029.55 C1.2
  other v1: 100,100 200,100 300,100 400,100 500,100 600,100 700,100 800,100 900,100 1000,100 1100,100 1200,100 1300,100 1400,100 1500,100 1600,100 1700,100 1800,100 1900,100 3800,100 150,200 250,200 1150,200 1250,200 1350,200 1450,200 1550,200 3250,200 3350,200 3850,200 100,300 200,300 300,300 400,300 600,300 700,300 800,300 900,300 1000,300 1100,300 1200,300 1300,300 1400,300 1500,300 1600,300 1700,300 1800,300 1900,300 2000,300 2100,300 2200,300 2300,300 2500,300 2600,300 2700,300 2800,300 2900,300 3000,300 3100,300 3200,300 3300,300 3400,300 3500,300 3700,300 3800,300 150,400 250,400 1850,400 1950,400 2150,400 2250,400 2350,400 2550,400 2650,400 2750,400 2950,400 3150,400 3350,400 3450,400 3550,400 3850,400 100,500 300,500 400,500 500,500 600,500 700,500 800,500 900,500 1000,500 2500,500 2600,500 2700,500 3200,500 3300,500 3400,500 3500,500 3600,500 3700,500 3800,500 350,600 450,600 550,600 650,600 950,600 1050,600 1150,600 1250,600 1350,600 1450,600 1550,600 1650,600 1750,600 2350,600 2450,600 2550,600 2750,600 2950,600 3150,600 3250,600 3350,600 3450,600 3850,600 300,700 400,700 600,700 1200,700 1300,700 1400,700 1500,700 1600,700 300,900 400,900 500,900 350,1000 1550,1200 1650,1200 1750,1200 1850,1200 300,1300 400,1300 500,1300 700,1300 900,1300 1100,1300 1200,1300 1300,1300 1400,1300 1500,1300 1600,1300 1700,1300 1800,1300 1900,1300 2000,1300 2100,1300 2200,1300 2300,1300 2500,1300 2700,1300 2800,1300 250,1400 350,1400 650,1400 750,1400 850,1400 950,1400 1350,1400 1450,1400 1550,1400 2700,1500 2800,1500 2650,1600 2700,1700 2800,1700 2650,1800 2750,1800 2700,1900 2650,2000 2750,2000 2700,2100 2800,2100 2650,2200 2750,2200 2700,2300 2800,2300 250,2400 450,2400 550,2400 650,2400 750,2400 1050,2400 1150,2400 1250,2400 1550,2400 1650,2400 1750,2400 1950,2400 2050,2400 2150,2400 2250,2400 2550,2400 2750,2400 300,2500 400,2500 1400,2500 1500,2500 1700,2500 1900,2500 2000,2500 2100,2500 2200,2500 2400,2500 2500,2500 2700,2500 2800,2500 250,2600 350,2600 650,2600 750,2600 850,2600 950,2600 1150,2600 1650,2600 1750,2600 1850,2600 1950,2600 2050,2600 2350,2600 2450,2600 2550,2600 2750,2600 2850,2600 300,2700 500,2700 600,2700 800,2700 900,2700 1000,2700 1200,2700 1300,2700 1600,2700 1700,2700 1800,2700 1900,2700 2000,2700 2100,2700 2300,2700 2400,2700 2500,2700 2700,2700 2800,2700 2900,2700 250,2800 450,2800 550,2800 650,2800 1150,2800 1250,2800 1450,2800 1750,2800 1950,2800 2050,2800 2250,2800 2350,2800 2450,2800 2550,2800 2750,2800 2850,2800 300,2900 400,2900 500,2900 600,2900 700,2900 2900,2900 3000,2900 250,3000 950,3000 1150,3000 1250,3000 2650,3000 2750,3000 2950,3000 3050,3000 300,3100 400,3100 500,3100 600,3100 700,3100 800,3100 1000,3100 1200,3100 1300,3100 1400,3100 1500,3100 1600,3100 1700,3100 1800,3100 2000,3100 2100,3100 2300,3100 2400,3100 2600,3100 2700,3100 2800,3100 3100,3100 250,3200 350,3200 450,3200 550,3200 650,3200 850,3200 950,3200 2750,3200 2850,3200 2950,3200 3150,3200 300,3300 600,3300 900,3300 1000,3300 1200,3300 1500,3300 1600,3300 1800,3300 1900,3300 2100,3300 2400,3300 2800,3300 3000,3300 150,3400 950,3400 1250,3400 100,3500 600,3500 900,3500 1000,3500 1200,3500 1300,3500 1500,3500 1600,3500 1800,3500 1900,3500 2200,3500 2400,3500 2700,3500 3000,3500 3100,3500 3300,3500 150,3600 2150,3600 2250,3600 2350,3600 2550,3600 2650,3600 2750,3600 2850,3600 3050,3600 3150,3600 3250,3600 3350,3600 200,3700 800,3700 1100,3700 1400,3700 1700,3700 2000,3700 2300,3700 2600,3700 2700,3700 2900,3700 3200,3700 3300,3700 150,3800 450,3800 750,3800 1050,3800 1350,3800 1650,3800 2050,3800 2650,3800 2950,3800 3250,3800
IN1: J1.1 S21.3 U1.7 U2.7 | length 4229.3
  Top Layer w12: U2.7 2206,1065 2191,1050 v3(2191,946) 2191,786.5 2212.5,765 U1.7 ; J1.1 3441.23,2948.77 3441.23,1096.27 3330,985.04 v2(3317.76,985.04)
  Bottom Layer w12: v3(2191,946) 2535.6,946 2540.1,950.5 3017.5,950.5 3052.04,985.04 v2(3317.76,985.04) 3330,985.04 3550,1205.04 S21.3
IN2: J1.2 S23.3 U3.7 U4.7 | length 4831.6
  Top Layer w12: U3.7 850,765 832,783 832,1048 843,1059 855,1059 856,1060 856,1075 U4.7 v3(936,1075)
  Bottom Layer w12: v3(936,1075) 2909.96,1075 S23.3 3578.94,1926.1 3578.94,2596.54 3584,2601.6 3584,2707.57 J1.2
NetC9_1: C9.1 U1.1 | length 358.3
  Top Layer w12: U1.1 2137,815 2200,752 C9.1
NetC10_1: C10.1 U2.1 | length 204.2
  Top Layer w12: U2.1 2066.72,1115 2071.72,1120 2071.72,1136.97 2154.75,1220 C10.1
NetC11_1: C11.1 U3.1 | length 375.2
  Top Layer w12: U3.1 779,815 794,800 794,693 829.53,657.47 C11.1
NetC12_1: C12.1 U4.1 | length 192.4
  Top Layer w12: U4.1 679.75,1169.75 760.33,1250.33 780.33,1250.33 C12.1
NetJ16_1: J16.1 U5.13 | length 4164.9
  Bottom Layer w12: U5.13 507.56,1620 375,1620 358.55,1603.55 358.55,1544.45 798,1105 2895,1105 3384,1594 3384,1944.43 J16.1
NetJ16_2: J16.2 U5.15 | length 3233.9
  Top Layer w12: v3(2289,2059) 3171,2059 J16.2
  Bottom Layer w12: U5.15 1068.47,2256.5 1394,2256.5 1439.5,2302 2046,2302 v3(2289,2059)
NetJ16_3: J16.3 U5.17 | length 3777.4
  Top Layer w12: U5.17 358,1627.92 358,1425 371,1412 v3(555,1412)
  Bottom Layer w12: v3(555,1412) 844,1123 999,1123 1043,1167 2725,1167 2832,1274 3006,1274 3300,1568 J16.3
NetJ17_1: J17.1 U6.13 | length 2620.1
  Top Layer w12: U6.13 1835.59,1620 1700,1620 1686,1606 1686,1528 1739,1475 v3(2608,1475)
  Bottom Layer w12: v3(2608,1475) 2608,1716 2976,2084 2976,2263.76 J17.1
NetJ17_2: J17.2 U6.15 | length 2843.8
  Top Layer w12: U6.15 1768.47,1711.53 1700,1711.53 1628.75,1640.27 1628.75,1411.75 1662.5,1378 v3(2648,1378)
  Bottom Layer w12: v3(2648,1378) 2648,1515 3140,2007 3140,2329.33 J17.2
NetJ17_3: J17.3 U6.17 | length 3136.5
  Top Layer w12: U6.17 1696.11,1638 1679,1638 1646.75,1605.75 1646.75,1439.25 1677,1409 2719,1409 2767,1361 2914,1361 3060,1507 3356.23,1507 3405.23,1556 3405.23,2012.77 3248,2170 v2(3180,2170)
  Top Layer w32: v2(3270,2260) 3270,2264.87 3280.67,2275.54 J17.3
  Bottom Layer w32: v2(3180,2170) v2(3270,2260)
NetL1_1: L1.1 U5.1 U5.2 | length 632.4
  Top Layer w32: U5.2 U5.1 1030,1764 L1.1
NetL2_1: L2.1 U5.3 U5.4 | length 563.8
  Top Layer w32: L2.1 954.41,1929.59 U5.3 U5.4
NetL3_1: L3.1 U5.5 U5.6 | length 852.3
  Top Layer w32: L3.1 462.52,2080 U5.5 U5.6
NetL4_1: L4.1 U6.1 U6.2 | length 1712.8
  Top Layer w12: U6.2 U6.1
  Top Layer w32: L4.1 1694.4,2445.6 1847.09,2445.6 2358.03,1934.66 U6.1
NetL5_1: L5.1 U6.3 U6.4 | length 2002.2
  Top Layer w12: U6.4 U6.3
  Top Layer w32: L5.1 1040,2780 2024.47,1795.53 2147.89,1795.53 2259.89,1683.53 2261.59,1683.53 2275.12,1670 U6.3
NetL6_1: L6.1 U6.5 U6.6 | length 2452
  Top Layer w12: U6.6 U6.5
  Top Layer w32: L6.1 624,2470 1260,2470 1356.5,2373.5 1366.3,2373.5 1982.27,1757.53 2110.3,1757.53 2197.83,1670 U6.5
NetR1_2: R1.2 U1.6 | length 119.3
  Top Layer w12: U1.6 2316,715 2321,710 R1.2
NetR2_2: R2.2 U2.6 | length 149.3
  Top Layer w12: U2.6 2321,1015 2326,1020 R2.2
NetR3_2: R3.2 U3.6 | length 149.3
  Top Layer w12: U3.6 961,715 966,720 R3.2
NetR4_2: R4.2 U4.6 | length 147.3
  Top Layer w12: U4.6 985,1020 R4.2
NetR5_1: R5.1 R6.1 S21.2 U1.8 U2.8 | length 2252.2
  Top Layer w12: U2.8 2321,1115 2326,1120 R6.1 2397.45,1165.41 2430.04,1198 2482.46,1198 2560,1120.46 v2(2560,880) ; U1.8 2316,815 2321,810 R5.1 v3(2377.45,884.45)
  Bottom Layer w12: v3(2377.45,884.45) 2412.89,919.89 2510,919.89 ; v2(2560,880) 2549.89,880 2510,919.89 ; S21.2 3457.1,1020 3356.99,919.89 2510,919.89
NetR7_1: R7.1 R8.1 S23.2 U3.8 U4.8 | length 5526.9
  Top Layer w12: U4.8 920.5,1125 952.41,1156.91 952.41,1175 966.91,1189.5 997.91,1189.5 1024.91,1162.5 ; U3.8 960,815 965,810 R7.1 1032.45,812.45 1032.45,937.55 v3(1030,940) ; R8.1 1024.91,1162.5 ; v3(1341,1028.5) 1192.47,1177.03 1037.5,1177.03 1024.91,1164.44 1024.91,1162.5
  Bottom Layer w12: v3(1030,940) 1602.03,940 1635.03,973 2202.18,973 2208.18,967 2531.14,967 2555.69,991.54 2990.54,991.54 3161.5,1162.5 3409.5,1162.5 3422,1402 S23.2 ; v3(1341,1028.5) 1378.5,991 2896,991
P_DIR: J3.2 U5.20 | length 5628
  Top Layer w12: v3(3538,926) 3538,3056.54 J3.2
  Bottom Layer w12: U5.20 585.08,355 2004,355 2489,840 2881.54,840 2925.54,884 3357.6,884 3399.6,926 v3(3538,926)
P_PWM: J3.1 U5.22 | length 5647
  Top Layer w12: v3(3478,899) 3478,3060 3580,3162 3596.54,3162 J3.1
  Bottom Layer w12: U5.22 663.56,276 2343,276 2933,866 3445,866 v3(3478,899)
Pmot1: J4.1 L1.2 | length 1346.8
  Bottom Layer w64: L1.2 1340,2529.17 1960,3149.17 J4.1
Pmot2: J7.1 L2.2 | length 1322
  Bottom Layer w64: L2.2 1078.81,2578.81 1078.81,3108.81 J7.1
Pmot3: J8.1 L3.2 | length 1274.5
  Bottom Layer w64: L3.2 750,2776 J8.1
S_DIR: J2.2 U6.20 | length 4758.7
  Top Layer w12: v3(3112,212) 3112,253.5 3396,537.5 3396,944 3459.23,1007.23 3459.23,3267.77 J2.2
  Bottom Layer w12: U6.20 1770.11,212 v3(3112,212)
S_PWM: J2.1 U6.22 | length 5152.1
  Top Layer w12: J2.1 3736,3312.54 3736,150 v3(3692,106)
  Bottom Layer w12: U6.22 1949.59,106 v3(3692,106)
Smot1: J9.1 L4.2 | length 2092.2
  Top Layer w64: L4.2 2421.16,3016 2748,3342.84 2748,3428 J9.1
Smot2: J10.1 L5.2 | length 1929.1
  Top Layer w12: L5.2 1020.81,3196.81 2406.81,3196.81 J10.1
Smot3: J11.1 L6.2 | length 3156.6
  Top Layer w64: L6.2 723.57,3020 807.07,2936.5 2776.5,2936.5 J11.1
Sol1: C9.2 J12.1 U1.3 | length 5902.6
  Top Layer w32: v2(1970,570) 2049,570 2059,560 C9.2 2140.94,661.67 2104.61,698 2091.5,698 2074.5,715 U1.3
  Top Layer w64: v2(290,430) 70,650 70,3400 302,3632 385.64,3632 501.47,3747.83 606.31,3747.83 J12.1
  Bottom Layer w64: v2(290,430) 1740,430 1770,460 1880,460 1970,550 v2(1970,570)
Sol2: C10.2 J13.1 U2.3 | length 3872
  Top Layer w32: U2.3 2064.5,1015 2081.5,1032 2094.61,1032 2192.5,1129.89 2192.5,1135.64 2241.17,1184.31 2241.17,1193.77 2259.53,1212.13 C10.2 2312,1220 2349.79,1257.79 2349.79,1259.79 v3(2440,1350)
  Bottom Layer w12: v3(2440,1350) 2443.3,1353.3 2443.3,1383 2453,1392.7
  Bottom Layer w64: J13.1 1401.9,3598.1 2026.12,3598.1 2172,3452.23 2172,2645.11 2490,2327.11 2490,1498.95 2453,1461.95 2453,1392.7
Sol3: C11.2 J14.1 U3.3 | length 5324.4
  Top Layer w32: U3.3 704.5,715 721.5,698 734.61,698 770.47,662.14 C11.2
  Top Layer w64: v2(320,560) 195,685 195,3340.16 455.41,3600.57 1670.57,3600.57 J14.1 ; v2(550,550) C11.2
  Bottom Layer w64: v2(320,560) 330,550 v2(550,550)
Sol4: C12.2 J15.1 U4.3 | length 4468.7
  Top Layer w32: U4.3 694.5,1025 711.5,1042 724.61,1042 822.5,1139.89 822.5,1161.57 846.36,1185.43 846.36,1257.3 C12.2 950,1260 v3(1000,1310)
  Top Layer w64: v2(1310,1440) v2(1700,1830) ; v2(1920,1990) 2140,1990 v2(2270,1860) ; v2(2420,1800) 2550,1800 v2(2560,1810)
  Bottom Layer w64: v3(1000,1310) 1130,1440 v2(1310,1440) ; v2(1700,1830) 1760,1830 v2(1920,1990) ; v2(2270,1860) 2360,1860 v2(2420,1800) ; J15.1 2460,3034.59 2620,2874.59 2620,2272.29 2560,2212.29 v2(2560,1810)
Vsense: J6.1
pads on no net: PS1.6 S1.x S2.x S3.x S4.x S21.1 S23.1 U1.5 U2.5 U3.5 U4.5 U5.12 U5.14 U5.16 U5.18 U5.19 U5.24 U5.25 U5.26 U5.27 U5.28 U5.29 U6.12 U6.14 U6.16 U6.18 U6.19 U6.24 U6.25 U6.26 U6.27 U6.28 U6.29

## Polygon pours and split planes (outlines as drawn)
GND on Bottom Layer "GND_L02_P002" (solid, pour order 2): 0,0 4060,0 4070,10 4070,4090 10,4090 0,4100
24v on Bottom Layer "24V_L02_P000" (solid, pour order 0): 220,1490 2590,1490 2590,2310 2570,2330 220,2330
GND on Top Layer "GND_L01_P005" (solid, pour order 5): 0,0 4040,0 4040,4150 4020,4130 0,4130
Battery on Top Layer "BATTERY_L01_P004" (solid, pour order 4): 2840,2545.39 3900,4395.01 3900,650 1980,650 1980,750 1580,750 1570,760 980,760 970,750 540,750 530,760 360,760 340,780 250,780 250,850 240,860 530,860 530,1050 510,1070 240,1070 240,1180 270,1210 1530,1210 1530,1050 2840,1050

## Silkscreen, mask and mechanical layers (free items; w line width, h text height)
Mechanical 13:
  the board outline again, w10

## Text inside footprints (layer, text, board x,y; h text height)
C2: Top Overlay "+" at 3359.02,1156.14 h59.06 r90
U1: Top Overlay "*" at 2037.25,832 h50; Mechanical 13 "*" at 2084,785.5 h50
U2: Top Overlay "*" at 2027.25,1132 h50; Mechanical 13 "*" at 2074,1085.5 h50
U3: Top Overlay "*" at 667.25,832 h50; Mechanical 13 "*" at 714,785.5 h50
U4: Top Overlay "*" at 657.25,1142 h50